# EAGLE board untitled (EAGLE 5.01)
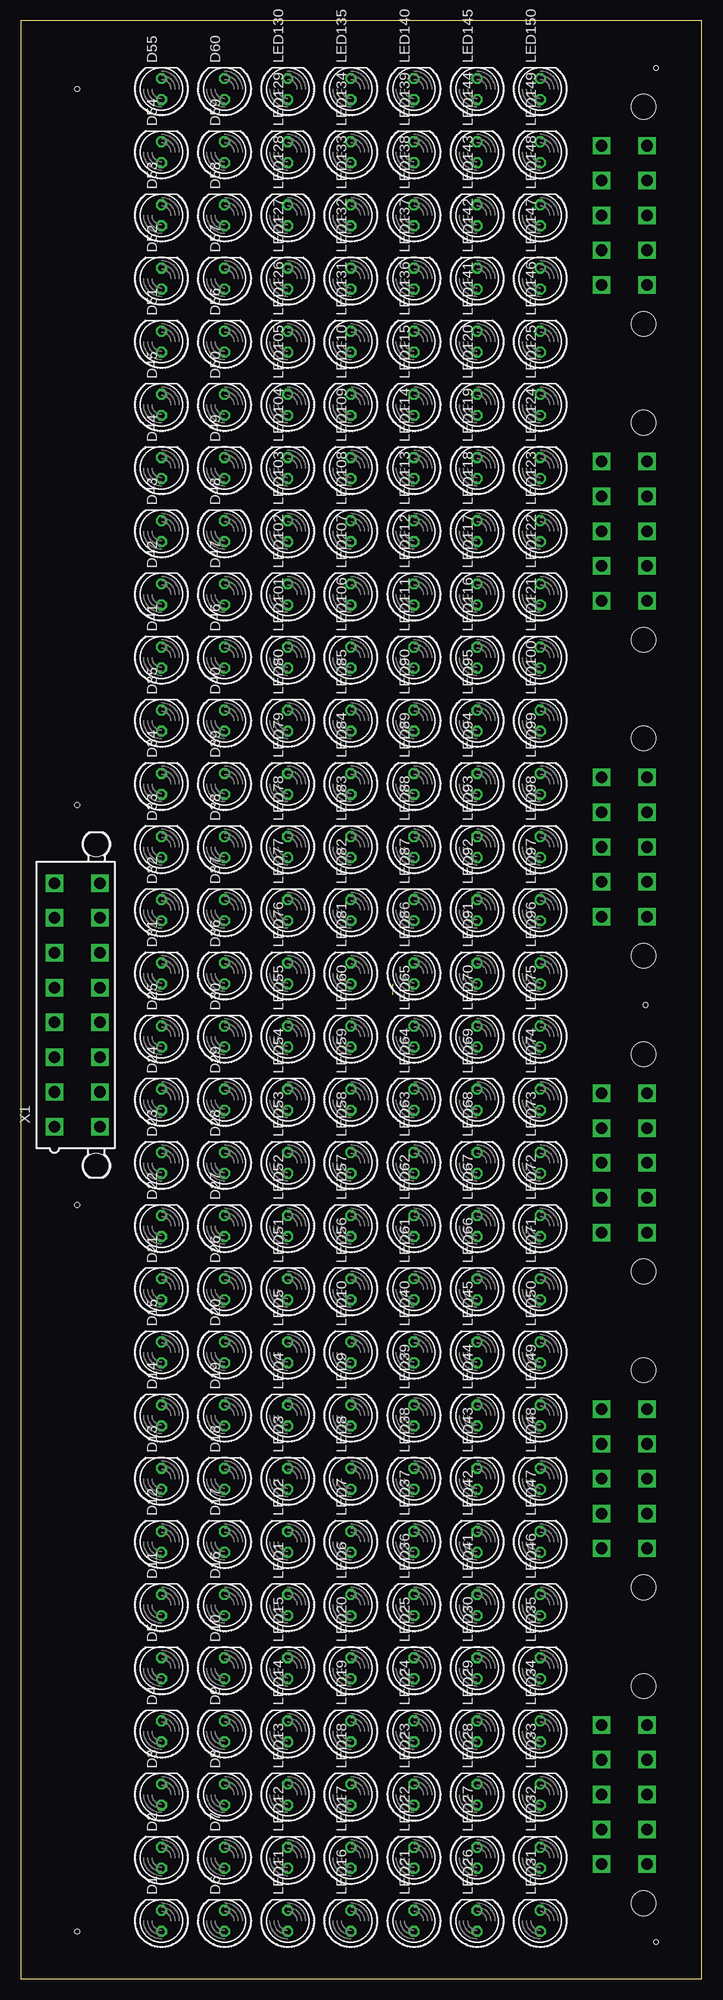
[diagram p0: board, top side]
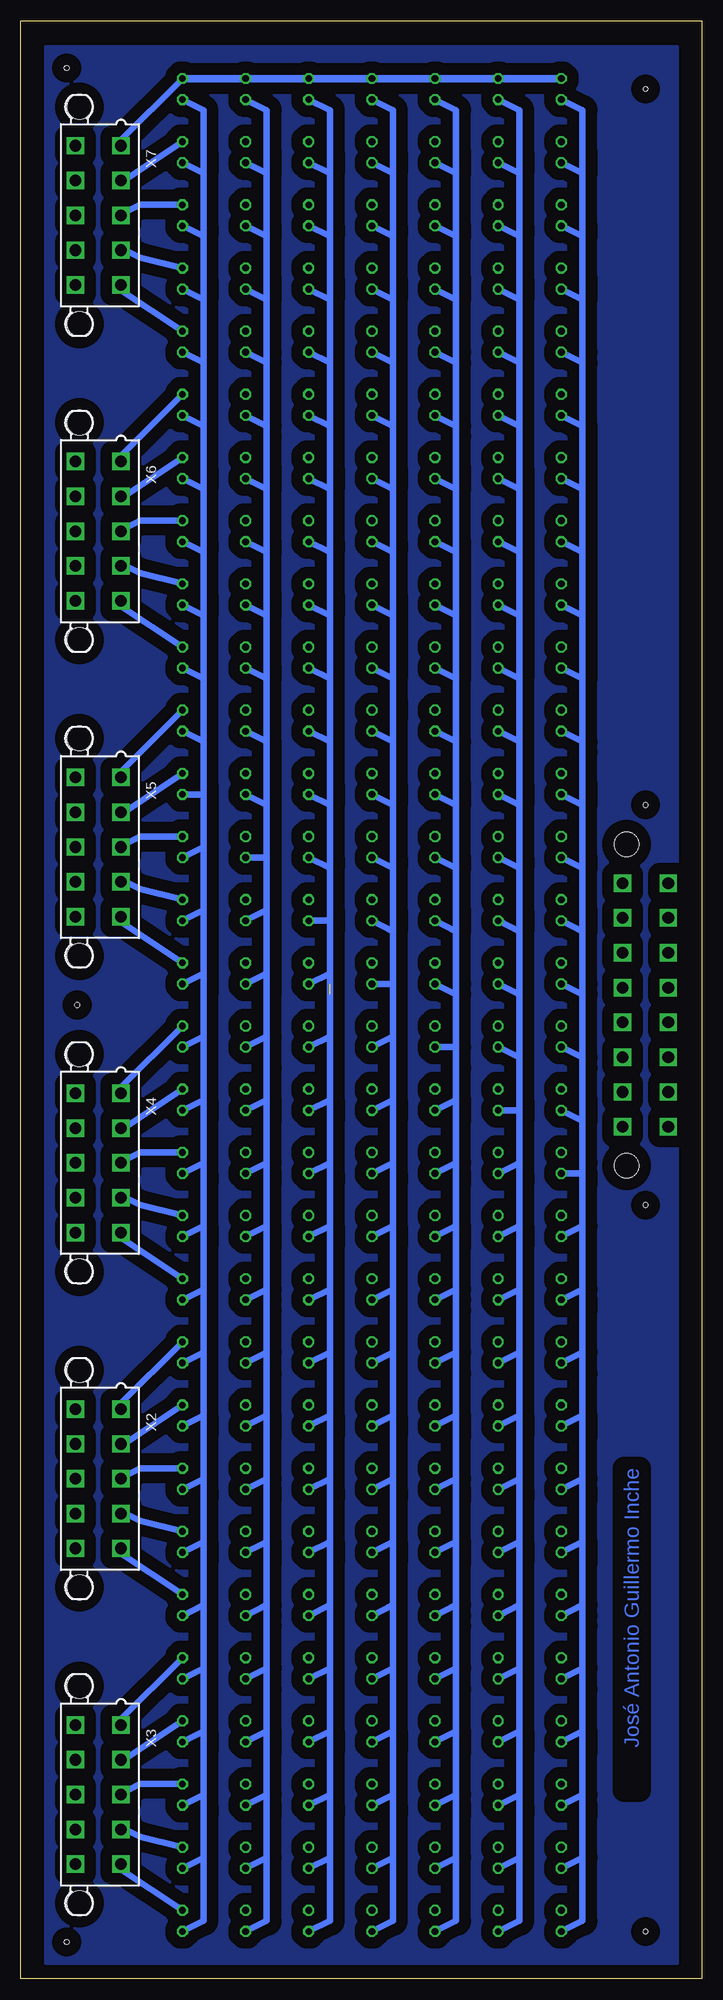
[diagram p1: board, bottom side, seen from below]

Size 82.22 x 236.2 mm. Coordinates in mm from the lower left corner, seen from the top.
Outline: 82.22,0 82.22,236.2 0,236.2 0,0 82.22,0
Copper layers (1*16): Top 0.035mm / dielectric 1.5mm / Bottom 0.035mm
Design rules "default *": minimum track width 30mil, minimum drill 24mil, track to track 8mil, track to pad 8mil, pad to pad 8mil, via to via 8mil, smd to smd 8mil, copper to edge 40mil, drill to drill 8mil, minimum pad ring 10mil, minimum via ring 8mil, stop-mask expansion 4mil, vias tented up to drill 0mil, thermal gap 10mil
Holes 0.6 mm at 6.82,5.71 6.82,227.96 76.67,230.5 76.67,4.44 6.82,93.34 6.82,141.6 75.4,117.47

## Footprints (pad centres in the part's own frame; a part is rotated, then mirrored left to right if it is on the bottom)
LED5MM = drill 0.813 octagon: A -1.27,0; K 1.27,0
5566-16 = drill 1.4 square: 1 14.7,-2.75; 2 10.5,-2.75; 3 6.3,-2.75; 4 2.1,-2.75; 5 -2.1,-2.75; 6 -6.3,-2.75; 7 -10.5,-2.75; 8 -14.7,-2.75; 9 14.7,2.75; 10 10.5,2.75; 11 6.3,2.75; 12 2.1,2.75; 13 -2.1,2.75; 14 -6.3,2.75; 15 -10.5,2.75; 16 -14.7,2.75 | hole 3: 19.4,2.29; -19.4,2.29
5566-10 = drill 1.4 square: 1 8.4,-2.75; 2 4.2,-2.75; 3 0,-2.75; 4 -4.2,-2.75; 5 -8.4,-2.75; 6 8.4,2.75; 7 4.2,2.75; 8 0,2.75; 9 -4.2,2.75; 10 -8.4,2.75 | hole 3: 13.1,2.29; -13.1,2.29

## Placement (x,y rotation side)
D1  [LED5MM]  16.98,6.98 90 top
D2  [LED5MM]  16.98,14.6 90 top
D3  [LED5MM]  16.98,22.22 90 top
D4  [LED5MM]  16.98,29.84 90 top
D5  [LED5MM]  16.98,37.46 90 top
D6  [LED5MM]  24.6,6.98 90 top
D7  [LED5MM]  24.6,14.6 90 top
D8  [LED5MM]  24.6,22.22 90 top
D9  [LED5MM]  24.6,29.84 90 top
D10  [LED5MM]  24.6,37.46 90 top
D11  [LED5MM]  16.98,45.08 90 top
D12  [LED5MM]  16.98,52.7 90 top
D13  [LED5MM]  16.98,60.32 90 top
D14  [LED5MM]  16.98,67.94 90 top
D15  [LED5MM]  16.98,75.56 90 top
D16  [LED5MM]  24.6,45.08 90 top
D17  [LED5MM]  24.6,52.7 90 top
D18  [LED5MM]  24.6,60.32 90 top
D19  [LED5MM]  24.6,67.94 90 top
D20  [LED5MM]  24.6,75.56 90 top
D21  [LED5MM]  16.98,83.18 90 top
D22  [LED5MM]  16.98,90.8 90 top
D23  [LED5MM]  16.98,98.42 90 top
D24  [LED5MM]  16.98,106.04 90 top
D25  [LED5MM]  16.98,113.66 90 top
D26  [LED5MM]  24.6,83.18 90 top
D27  [LED5MM]  24.6,90.8 90 top
D28  [LED5MM]  24.6,98.42 90 top
D29  [LED5MM]  24.6,106.04 90 top
D30  [LED5MM]  24.6,113.66 90 top
D31  [LED5MM]  16.98,121.28 90 top
D32  [LED5MM]  16.98,128.9 90 top
D33  [LED5MM]  16.98,136.52 90 top
D34  [LED5MM]  16.98,144.14 90 top
D35  [LED5MM]  16.98,151.76 90 top
D36  [LED5MM]  24.6,121.28 90 top
D37  [LED5MM]  24.6,128.9 90 top
D38  [LED5MM]  24.6,136.52 90 top
D39  [LED5MM]  24.6,144.14 90 top
D40  [LED5MM]  24.6,151.76 90 top
D41  [LED5MM]  16.98,159.38 90 top
D42  [LED5MM]  16.98,167 90 top
D43  [LED5MM]  16.98,174.62 90 top
D44  [LED5MM]  16.98,182.24 90 top
D45  [LED5MM]  16.98,189.86 90 top
D46  [LED5MM]  24.6,159.38 90 top
D47  [LED5MM]  24.6,167 90 top
D48  [LED5MM]  24.6,174.62 90 top
D49  [LED5MM]  24.6,182.24 90 top
D50  [LED5MM]  24.6,189.86 90 top
D51  [LED5MM]  16.98,197.48 90 top
D52  [LED5MM]  16.98,205.1 90 top
D53  [LED5MM]  16.98,212.72 90 top
D54  [LED5MM]  16.98,220.34 90 top
D55  [LED5MM]  16.98,227.96 90 top
D56  [LED5MM]  24.6,197.48 90 top
D57  [LED5MM]  24.6,205.1 90 top
D58  [LED5MM]  24.6,212.72 90 top
D59  [LED5MM]  24.6,220.34 90 top
D60  [LED5MM]  24.6,227.96 90 top
LED1  [LED5MM]  32.22,45.08 90 top
LED2  [LED5MM]  32.22,52.7 90 top
LED3  [LED5MM]  32.22,60.32 90 top
LED4  [LED5MM]  32.22,67.94 90 top
LED5  [LED5MM]  32.22,75.56 90 top
LED6  [LED5MM]  39.84,45.08 90 top
LED7  [LED5MM]  39.84,52.7 90 top
LED8  [LED5MM]  39.84,60.32 90 top
LED9  [LED5MM]  39.84,67.94 90 top
LED10  [LED5MM]  39.84,75.56 90 top
LED11  [LED5MM]  32.22,6.98 90 top
LED12  [LED5MM]  32.22,14.6 90 top
LED13  [LED5MM]  32.22,22.22 90 top
LED14  [LED5MM]  32.22,29.84 90 top
LED15  [LED5MM]  32.22,37.46 90 top
LED16  [LED5MM]  39.84,6.98 90 top
LED17  [LED5MM]  39.84,14.6 90 top
LED18  [LED5MM]  39.84,22.22 90 top
LED19  [LED5MM]  39.84,29.84 90 top
LED20  [LED5MM]  39.84,37.46 90 top
LED21  [LED5MM]  47.46,6.98 90 top
LED22  [LED5MM]  47.46,14.6 90 top
LED23  [LED5MM]  47.46,22.22 90 top
LED24  [LED5MM]  47.46,29.84 90 top
LED25  [LED5MM]  47.46,37.46 90 top
LED26  [LED5MM]  55.08,6.98 90 top
LED27  [LED5MM]  55.08,14.6 90 top
LED28  [LED5MM]  55.08,22.22 90 top
LED29  [LED5MM]  55.08,29.84 90 top
LED30  [LED5MM]  55.08,37.46 90 top
LED31  [LED5MM]  62.7,6.98 90 top
LED32  [LED5MM]  62.7,14.6 90 top
LED33  [LED5MM]  62.7,22.22 90 top
LED34  [LED5MM]  62.7,29.84 90 top
LED35  [LED5MM]  62.7,37.46 90 top
LED36  [LED5MM]  47.46,45.08 90 top
LED37  [LED5MM]  47.46,52.7 90 top
LED38  [LED5MM]  47.46,60.32 90 top
LED39  [LED5MM]  47.46,67.94 90 top
LED40  [LED5MM]  47.46,75.56 90 top
LED41  [LED5MM]  55.08,45.08 90 top
LED42  [LED5MM]  55.08,52.7 90 top
LED43  [LED5MM]  55.08,60.32 90 top
LED44  [LED5MM]  55.08,67.94 90 top
LED45  [LED5MM]  55.08,75.56 90 top
LED46  [LED5MM]  62.7,45.08 90 top
LED47  [LED5MM]  62.7,52.7 90 top
LED48  [LED5MM]  62.7,60.32 90 top
LED49  [LED5MM]  62.7,67.94 90 top
LED50  [LED5MM]  62.7,75.56 90 top
LED51  [LED5MM]  32.22,83.18 90 top
LED52  [LED5MM]  32.22,90.8 90 top
LED53  [LED5MM]  32.22,98.42 90 top
LED54  [LED5MM]  32.22,106.04 90 top
LED55  [LED5MM]  32.22,113.66 90 top
LED56  [LED5MM]  39.84,83.18 90 top
LED57  [LED5MM]  39.84,90.8 90 top
LED58  [LED5MM]  39.84,98.42 90 top
LED59  [LED5MM]  39.84,106.04 90 top
LED60  [LED5MM]  39.84,113.66 90 top
LED61  [LED5MM]  47.46,83.18 90 top
LED62  [LED5MM]  47.46,90.8 90 top
LED63  [LED5MM]  47.46,98.42 90 top
LED64  [LED5MM]  47.46,106.04 90 top
LED65  [LED5MM]  47.46,113.66 90 top
LED66  [LED5MM]  55.08,83.18 90 top
LED67  [LED5MM]  55.08,90.8 90 top
LED68  [LED5MM]  55.08,98.42 90 top
LED69  [LED5MM]  55.08,106.04 90 top
LED70  [LED5MM]  55.08,113.66 90 top
LED71  [LED5MM]  62.7,83.18 90 top
LED72  [LED5MM]  62.7,90.8 90 top
LED73  [LED5MM]  62.7,98.42 90 top
LED74  [LED5MM]  62.7,106.04 90 top
LED75  [LED5MM]  62.7,113.66 90 top
LED76  [LED5MM]  32.22,121.28 90 top
LED77  [LED5MM]  32.22,128.9 90 top
LED78  [LED5MM]  32.22,136.52 90 top
LED79  [LED5MM]  32.22,144.14 90 top
LED80  [LED5MM]  32.22,151.76 90 top
LED81  [LED5MM]  39.84,121.28 90 top
LED82  [LED5MM]  39.84,128.9 90 top
LED83  [LED5MM]  39.84,136.52 90 top
LED84  [LED5MM]  39.84,144.14 90 top
LED85  [LED5MM]  39.84,151.76 90 top
LED86  [LED5MM]  47.46,121.28 90 top
LED87  [LED5MM]  47.46,128.9 90 top
LED88  [LED5MM]  47.46,136.52 90 top
LED89  [LED5MM]  47.46,144.14 90 top
LED90  [LED5MM]  47.46,151.76 90 top
LED91  [LED5MM]  55.08,121.28 90 top
LED92  [LED5MM]  55.08,128.9 90 top
LED93  [LED5MM]  55.08,136.52 90 top
LED94  [LED5MM]  55.08,144.14 90 top
LED95  [LED5MM]  55.08,151.76 90 top
LED96  [LED5MM]  62.7,121.28 90 top
LED97  [LED5MM]  62.7,128.9 90 top
LED98  [LED5MM]  62.7,136.52 90 top
LED99  [LED5MM]  62.7,144.14 90 top
LED100  [LED5MM]  62.7,151.76 90 top
LED101  [LED5MM]  32.22,159.38 90 top
LED102  [LED5MM]  32.22,167 90 top
LED103  [LED5MM]  32.22,174.62 90 top
LED104  [LED5MM]  32.22,182.24 90 top
LED105  [LED5MM]  32.22,189.86 90 top
LED106  [LED5MM]  39.84,159.38 90 top
LED107  [LED5MM]  39.84,167 90 top
LED108  [LED5MM]  39.84,174.62 90 top
LED109  [LED5MM]  39.84,182.24 90 top
LED110  [LED5MM]  39.84,189.86 90 top
LED111  [LED5MM]  47.46,159.38 90 top
LED112  [LED5MM]  47.46,167 90 top
LED113  [LED5MM]  47.46,174.62 90 top
LED114  [LED5MM]  47.46,182.24 90 top
LED115  [LED5MM]  47.46,189.86 90 top
LED116  [LED5MM]  55.08,159.38 90 top
LED117  [LED5MM]  55.08,167 90 top
LED118  [LED5MM]  55.08,174.62 90 top
LED119  [LED5MM]  55.08,182.24 90 top
LED120  [LED5MM]  55.08,189.86 90 top
LED121  [LED5MM]  62.7,159.38 90 top
LED122  [LED5MM]  62.7,167 90 top
LED123  [LED5MM]  62.7,174.62 90 top
LED124  [LED5MM]  62.7,182.24 90 top
LED125  [LED5MM]  62.7,189.86 90 top
LED126  [LED5MM]  32.22,197.48 90 top
LED127  [LED5MM]  32.22,205.1 90 top
LED128  [LED5MM]  32.22,212.72 90 top
LED129  [LED5MM]  32.22,220.34 90 top
LED130  [LED5MM]  32.22,227.96 90 top
LED131  [LED5MM]  39.84,197.48 90 top
LED132  [LED5MM]  39.84,205.1 90 top
LED133  [LED5MM]  39.84,212.72 90 top
LED134  [LED5MM]  39.84,220.34 90 top
LED135  [LED5MM]  39.84,227.96 90 top
LED136  [LED5MM]  47.46,197.48 90 top
LED137  [LED5MM]  47.46,205.1 90 top
LED138  [LED5MM]  47.46,212.72 90 top
LED139  [LED5MM]  47.46,220.34 90 top
LED140  [LED5MM]  47.46,227.96 90 top
LED141  [LED5MM]  55.08,197.48 90 top
LED142  [LED5MM]  55.08,205.1 90 top
LED143  [LED5MM]  55.08,212.72 90 top
LED144  [LED5MM]  55.08,220.34 90 top
LED145  [LED5MM]  55.08,227.96 90 top
LED146  [LED5MM]  62.7,197.48 90 top
LED147  [LED5MM]  62.7,205.1 90 top
LED148  [LED5MM]  62.7,212.72 90 top
LED149  [LED5MM]  62.7,220.34 90 top
LED150  [LED5MM]  62.7,227.96 90 top
X1  5566-16  [5566-16]  6.82,117.47 270 top
X2  5566-10  [5566-10]  72.86,60.32 90 bottom
X3  5566-10  [5566-10]  72.86,22.22 90 bottom
X4  5566-10  [5566-10]  72.86,98.42 90 bottom
X5  5566-10  [5566-10]  72.86,136.52 90 bottom
X6  5566-10  [5566-10]  72.86,174.62 90 bottom
X7  5566-10  [5566-10]  72.86,212.72 90 bottom

## Library data of the parts
D1-D60 LED1-LED150 = led
X1-X7 = con-molex

## Nets
N$22: D36.A D37.A D38.A D39.A D40.A
N$29: D46.A D47.A D48.A D49.A D50.A
N$36: D56.A D57.A D58.A D59.A D60.A
S$1: LED31.K
S$4: LED32.K
S$5: LED33.K
S$6: LED34.K
S$7: LED35.K
S$31: D55.K

## Tracks (layer width: path | path; a pad name or v marks a point on that pad's centre or on a via)
N$1
  Bottom 0.762: 22.06,106.04 22.06,104.77 | 22.06,104.77 22.06,103.5 | 22.06,104.77 24.6,104.77 | 22.06,106.04 22.06,109.85 | 22.06,109.85 22.06,111.12 24.6,112.39 | 22.06,97.15 22.06,95.88 | 22.06,97.15 22.06,98.42 24.6,97.15 | 22.06,97.15 22.06,106.04 | 22.06,90.8 22.06,88.26 | 22.06,90.8 22.06,89.53 | 22.06,90.8 24.6,89.53 | 22.06,90.8 22.06,97.15 | 22.06,80.64 22.06,90.8 | 24.6,81.91 22.06,83.18 22.06,80.64 | 22.06,80.64 22.06,81.91 | 22.06,109.85 22.06,118.74
N$2
  Bottom 0.762: 14.44,73.02 14.44,75.56 16.98,74.29 | 14.44,73.02 14.44,81.91 | 14.44,67.94 16.98,66.67 | 14.44,67.94 14.44,65.4 | 14.44,67.94 14.44,73.02 | 14.44,59.05 14.44,60.32 16.98,59.05 | 14.44,59.05 14.44,57.78 | 14.44,59.05 14.44,67.94 | 14.44,52.7 16.98,51.43 | 14.44,52.7 14.44,50.16 | 14.44,52.7 14.44,59.05 | 14.44,42.54 14.44,52.7 | 14.44,42.54 14.44,45.08 16.98,43.81 | 14.44,42.54 14.44,43.81 | 14.44,34.92 14.44,37.46 16.98,36.19 | 14.44,34.92 14.44,42.54 | 14.44,29.84 16.98,28.57 | 14.44,29.84 14.44,27.3 | 14.44,29.84 14.44,34.92 | 14.44,20.95 14.44,22.22 16.98,20.95 | 14.44,20.95 14.44,19.68 | 14.44,20.95 14.44,29.84 | 14.44,14.6 16.98,13.33 | 14.44,14.6 14.44,20.95 | 14.44,14.6 14.44,6.98 16.98,5.71
N$3
  Bottom 0.762: 22.06,73.02 22.06,75.56 24.6,74.29 | 22.06,73.02 22.06,81.91 | 22.06,67.94 24.6,66.67 | 22.06,67.94 22.06,65.4 | 22.06,67.94 22.06,73.02 | 22.06,59.05 22.06,60.32 24.6,59.05 | 22.06,59.05 22.06,57.78 | 22.06,59.05 22.06,67.94 | 22.06,52.7 24.6,51.43 | 22.06,52.7 22.06,50.16 | 22.06,52.7 22.06,59.05 | 22.06,42.54 22.06,52.7 | 22.06,42.54 22.06,45.08 24.6,43.81 | 22.06,42.54 22.06,43.81 | 22.06,34.92 22.06,37.46 24.6,36.19 | 22.06,34.92 22.06,42.54 | 22.06,29.84 24.6,28.57 | 22.06,29.84 22.06,27.3 | 22.06,29.84 22.06,34.92 | 22.06,20.95 22.06,22.22 24.6,20.95 | 22.06,20.95 22.06,19.68 | 22.06,20.95 22.06,29.84 | 22.06,14.6 24.6,13.33 | 22.06,14.6 22.06,20.95 | 22.06,14.6 22.06,6.98 24.6,5.71
N$4
  Bottom 0.762: 29.68,106.04 29.68,103.5 | 29.68,106.04 32.22,104.77 | 29.68,106.04 29.68,109.85 | 29.68,97.15 29.68,95.88 | 29.68,97.15 29.68,98.42 32.22,97.15 | 29.68,97.15 29.68,106.04 | 29.68,90.8 29.68,88.26 | 29.68,90.8 32.22,89.53 | 29.68,90.8 29.68,97.15 | 29.68,80.64 29.68,90.8 | 32.22,81.91 29.68,83.18 29.68,80.64 | 29.68,80.64 29.68,81.91 | 29.68,109.85 29.68,112.39 32.22,112.39 | 29.68,109.85 29.68,118.74
N$5
  Bottom 0.762: 29.68,73.02 29.68,75.56 32.22,74.29 | 29.68,73.02 29.68,81.91 | 29.68,67.94 32.22,66.67 | 29.68,67.94 29.68,65.4 | 29.68,67.94 29.68,73.02 | 29.68,59.05 29.68,60.32 32.22,59.05 | 29.68,59.05 29.68,57.78 | 29.68,59.05 29.68,67.94 | 29.68,52.7 32.22,51.43 | 29.68,52.7 29.68,50.16 | 29.68,52.7 29.68,59.05 | 29.68,42.54 29.68,52.7 | 29.68,42.54 29.68,45.08 32.22,43.81 | 29.68,42.54 29.68,43.81 | 29.68,34.92 29.68,37.46 32.22,36.19 | 29.68,34.92 29.68,42.54 | 29.68,29.84 32.22,28.57 | 29.68,29.84 29.68,27.3 | 29.68,29.84 29.68,34.92 | 29.68,20.95 29.68,22.22 32.22,20.95 | 29.68,20.95 29.68,19.68 | 29.68,20.95 29.68,29.84 | 29.68,14.6 32.22,13.33 | 29.68,14.6 29.68,20.95 | 29.68,14.6 29.68,6.98 32.22,5.71
N$6
  Bottom 0.762: 37.3,106.04 37.3,103.5 | 37.3,106.04 39.84,104.77 | 37.3,106.04 37.3,109.85 | 37.3,97.15 37.3,95.88 | 37.3,97.15 37.3,98.42 39.84,97.15 | 37.3,97.15 37.3,106.04 | 37.3,90.8 37.3,88.26 | 37.3,90.8 39.84,89.53 | 37.3,90.8 37.3,97.15 | 37.3,80.64 37.3,90.8 | 39.84,81.91 37.3,83.18 37.3,80.64 | 37.3,80.64 37.3,81.91 | 37.3,109.85 37.3,113.66 39.84,112.39 | 37.3,109.85 37.3,118.74
N$7
  Bottom 0.762: 37.3,73.02 37.3,75.56 39.84,74.29 | 37.3,73.02 37.3,81.91 | 37.3,67.94 39.84,66.67 | 37.3,67.94 37.3,65.4 | 37.3,67.94 37.3,73.02 | 37.3,59.05 37.3,60.32 39.84,59.05 | 37.3,59.05 37.3,57.78 | 37.3,59.05 37.3,67.94 | 37.3,52.7 39.84,51.43 | 37.3,52.7 37.3,50.16 | 37.3,52.7 37.3,59.05 | 37.3,42.54 37.3,52.7 | 37.3,42.54 37.3,45.08 39.84,43.81 | 37.3,42.54 37.3,43.81 | 37.3,34.92 37.3,37.46 39.84,36.19 | 37.3,34.92 37.3,42.54 | 37.3,29.84 39.84,28.57 | 37.3,29.84 37.3,27.3 | 37.3,29.84 37.3,34.92 | 37.3,20.95 37.3,22.22 39.84,20.95 | 37.3,20.95 37.3,19.68 | 37.3,20.95 37.3,29.84 | 37.3,14.6 39.84,13.33 | 37.3,14.6 37.3,20.95 | 37.3,14.6 37.3,6.98 39.84,5.71
N$8
  Bottom 0.762: 44.92,106.04 44.92,103.5 | 44.92,106.04 47.46,104.77 | 44.92,106.04 44.92,109.85 | 44.92,97.15 44.92,95.88 | 44.92,97.15 44.92,98.42 47.46,97.15 | 44.92,97.15 44.92,106.04 | 44.92,90.8 44.92,88.26 | 44.92,90.8 47.46,89.53 | 44.92,90.8 44.92,97.15 | 44.92,80.64 44.92,90.8 | 47.46,81.91 44.92,83.18 44.92,80.64 | 44.92,80.64 44.92,81.91 | 44.92,109.85 44.92,113.66 47.46,112.39 | 44.92,109.85 44.92,118.74
N$9
  Bottom 0.762: 44.92,73.02 44.92,75.56 47.46,74.29 | 44.92,73.02 44.92,81.91 | 44.92,67.94 47.46,66.67 | 44.92,67.94 44.92,65.4 | 44.92,67.94 44.92,73.02 | 44.92,59.05 44.92,60.32 47.46,59.05 | 44.92,59.05 44.92,57.78 | 44.92,59.05 44.92,67.94 | 44.92,52.7 47.46,51.43 | 44.92,52.7 44.92,50.16 | 44.92,52.7 44.92,59.05 | 44.92,42.54 44.92,52.7 | 44.92,42.54 44.92,45.08 47.46,43.81 | 44.92,42.54 44.92,43.81 | 44.92,34.92 44.92,37.46 47.46,36.19 | 44.92,34.92 44.92,42.54 | 44.92,29.84 47.46,28.57 | 44.92,29.84 44.92,27.3 | 44.92,29.84 44.92,34.92 | 44.92,20.95 44.92,22.22 47.46,20.95 | 44.92,20.95 44.92,19.68 | 44.92,20.95 44.92,29.84 | 44.92,14.6 47.46,13.33 | 44.92,14.6 44.92,20.95 | 44.92,14.6 44.92,6.98 47.46,5.71
N$10
  Bottom 0.762: 52.54,106.04 52.54,103.5 | 52.54,106.04 55.08,104.77 | 52.54,106.04 52.54,109.85 | 52.54,97.15 52.54,95.88 | 52.54,97.15 52.54,98.42 55.08,97.15 | 52.54,97.15 52.54,106.04 | 52.54,90.8 52.54,88.26 | 52.54,90.8 55.08,89.53 | 52.54,90.8 52.54,97.15 | 52.54,80.64 52.54,90.8 | 55.08,81.91 52.54,83.18 52.54,80.64 | 52.54,80.64 52.54,81.91 | 52.54,109.85 52.54,113.66 55.08,112.39 | 52.54,109.85 52.54,118.74
N$11
  Bottom 0.762: 52.54,73.02 52.54,75.56 55.08,74.29 | 52.54,73.02 52.54,81.91 | 52.54,67.94 55.08,66.67 | 52.54,67.94 52.54,65.4 | 52.54,67.94 52.54,73.02 | 52.54,59.05 52.54,60.32 55.08,59.05 | 52.54,59.05 52.54,57.78 | 52.54,59.05 52.54,67.94 | 52.54,52.7 55.08,51.43 | 52.54,52.7 52.54,50.16 | 52.54,52.7 52.54,59.05 | 52.54,42.54 52.54,52.7 | 52.54,42.54 52.54,45.08 55.08,43.81 | 52.54,42.54 52.54,43.81 | 52.54,34.92 52.54,37.46 55.08,36.19 | 52.54,34.92 52.54,42.54 | 52.54,29.84 55.08,28.57 | 52.54,29.84 52.54,27.3 | 52.54,29.84 52.54,34.92 | 52.54,20.95 52.54,22.22 55.08,20.95 | 52.54,20.95 52.54,19.68 | 52.54,20.95 52.54,29.84 | 52.54,14.6 55.08,13.33 | 52.54,14.6 52.54,20.95 | 52.54,14.6 52.54,6.98 55.08,5.71
N$12
  Bottom 0.762: 60.16,106.04 60.16,103.5 | 60.16,106.04 62.7,104.77 | 60.16,106.04 60.16,109.85 | 60.16,97.15 60.16,95.88 | 60.16,97.15 60.16,98.42 62.7,97.15 | 60.16,97.15 60.16,106.04 | 60.16,90.8 60.16,88.26 | 60.16,90.8 62.7,89.53 | 60.16,90.8 60.16,97.15 | 60.16,80.64 60.16,90.8 | 62.7,81.91 60.16,83.18 60.16,80.64 | 60.16,80.64 60.16,81.91 | 60.16,109.85 60.16,113.66 62.7,112.39 | 60.16,109.85 60.16,118.74
N$13
  Bottom 0.762: 60.16,73.02 60.16,75.56 62.7,74.29 | 60.16,73.02 60.16,81.91 | 60.16,67.94 62.7,66.67 | 60.16,67.94 60.16,65.4 | 60.16,67.94 60.16,73.02 | 60.16,59.05 60.16,60.32 62.7,59.05 | 60.16,59.05 60.16,57.78 | 60.16,59.05 60.16,67.94 | 60.16,52.7 62.7,51.43 | 60.16,52.7 60.16,50.16 | 60.16,52.7 60.16,59.05 | 60.16,42.54 60.16,52.7 | 60.16,42.54 60.16,45.08 62.7,43.81 | 60.16,42.54 60.16,43.81 | 60.16,34.92 60.16,37.46 62.7,36.19 | 60.16,34.92 60.16,42.54 | 60.16,29.84 62.7,28.57 | 60.16,29.84 60.16,27.3 | 60.16,29.84 60.16,34.92 | 60.16,20.95 60.16,22.22 62.7,20.95 | 60.16,20.95 60.16,19.68 | 60.16,20.95 60.16,29.84 | 60.16,14.6 62.7,13.33 | 60.16,14.6 60.16,20.95 | 60.16,14.6 60.16,6.98 62.7,5.71
N$17
  Bottom 0.762: 14.44,106.04 14.44,103.5 16.98,104.77 | 14.44,106.04 14.44,109.85 | 14.44,109.85 14.44,111.12 16.98,112.39 | 14.44,97.15 14.44,98.42 | 14.44,97.15 14.44,95.88 | 14.44,97.15 16.98,97.15 | 14.44,97.15 14.44,106.04 | 14.44,90.8 16.98,89.53 | 14.44,90.8 14.44,97.15 | 14.44,81.91 14.44,90.8 | 16.98,81.91 14.44,83.18 14.44,81.91 | 14.44,81.91 14.44,80.64 | 14.44,109.85 14.44,118.74
N$22
  Bottom 0.762: 22.06,149.22 D40.A | 22.06,144.14 22.06,141.6 D39.A | 22.06,144.14 22.06,149.22 | 22.06,135.25 22.06,133.98 D38.A | 22.06,135.25 22.06,144.14 | 22.06,128.9 22.06,126.36 D37.A | 22.06,128.9 22.06,135.25 | 22.06,118.74 22.06,128.9 | 22.06,118.74 D36.A | 22.06,118.74 22.06,120.01 | 22.06,149.22 22.06,158.11
N$23
  Bottom 0.762: 29.68,149.22 32.22,150.49 | 29.68,144.14 29.68,141.6 32.22,142.87 | 29.68,144.14 29.68,149.22 | 29.68,135.25 29.68,133.98 32.22,135.25 | 29.68,135.25 29.68,144.14 | 29.68,128.9 29.68,126.36 32.22,127.63 | 29.68,128.9 29.68,135.25 | 29.68,118.74 29.68,128.9 | 29.68,118.74 32.22,120.01 | 29.68,118.74 29.68,120.01 | 29.68,149.22 29.68,158.11
N$24
  Bottom 0.762: 14.44,144.14 14.44,141.6 16.98,142.87 | 14.44,144.14 14.44,147.95 | 14.44,147.95 14.44,149.22 16.98,150.49 | 14.44,135.25 14.44,133.98 16.98,135.25 | 14.44,135.25 14.44,144.14 | 14.44,128.9 14.44,126.36 16.98,127.63 | 14.44,128.9 14.44,135.25 | 14.44,118.74 14.44,128.9 | 14.44,118.74 16.98,120.01 | 14.44,118.74 14.44,120.01 | 14.44,147.95 14.44,156.84
N$25
  Bottom 0.762: 37.3,149.22 39.84,150.49 | 37.3,144.14 37.3,141.6 39.84,142.87 | 37.3,144.14 37.3,149.22 | 37.3,135.25 37.3,133.98 39.84,135.25 | 37.3,135.25 37.3,144.14 | 37.3,128.9 37.3,126.36 39.84,127.63 | 37.3,128.9 37.3,135.25 | 37.3,120.01 37.3,128.9 | 37.3,120.01 39.84,120.01 | 37.3,118.74 37.3,120.01 | 37.3,154.3 37.3,151.76 | 37.3,154.3 37.3,156.84 | 37.3,149.22 37.3,154.3
N$26  (1 unrouted)
  Bottom 0.762: 47.46,150.49 44.92,149.22 44.92,147.95 | 44.92,144.14 44.92,141.6 47.46,142.87 | 44.92,144.14 44.92,147.95 | 44.92,135.25 44.92,133.98 47.46,135.25 | 44.92,135.25 44.92,144.14 | 44.92,128.9 44.92,127.63 | 44.92,127.63 44.92,126.36 | 44.92,127.63 47.46,127.63 | 44.92,128.9 44.92,135.25 | 44.92,120.01 44.92,121.28 47.46,120.01 | 44.92,118.74 44.92,128.9 | 44.92,147.95 44.92,156.84
N$27
  Bottom 0.762: 55.08,150.49 52.54,149.22 | 52.54,144.14 52.54,141.6 55.08,142.87 | 52.54,149.22 52.54,144.14 | 52.54,135.25 52.54,133.98 | 52.54,135.25 55.08,135.25 | 52.54,144.14 52.54,135.25 | 52.54,128.9 52.54,126.36 | 52.54,128.9 55.08,127.63 | 52.54,135.25 52.54,128.9 | 52.54,128.9 52.54,120.01 | 55.08,120.01 52.54,121.28 52.54,120.01 | 52.54,120.01 52.54,118.74 | 52.54,149.22 52.54,158.11
N$28
  Bottom 0.762: 62.7,150.49 60.16,149.22 60.16,147.95 | 60.16,144.14 60.16,142.87 | 60.16,142.87 60.16,141.6 | 60.16,142.87 62.7,142.87 | 60.16,144.14 60.16,147.95 | 60.16,135.25 60.16,133.98 | 60.16,135.25 60.16,136.52 62.7,135.25 | 60.16,144.14 60.16,135.25 | 60.16,128.9 60.16,126.36 | 60.16,128.9 62.7,127.63 | 60.16,135.25 60.16,128.9 | 60.16,121.28 62.7,120.01 | 60.16,121.28 60.16,118.74 | 60.16,128.9 60.16,121.28 | 60.16,147.95 60.16,156.84
N$29
  Bottom 0.762: 22.06,187.32 D50.A | 22.06,182.24 22.06,179.7 D49.A | 22.06,182.24 22.06,187.32 | 22.06,173.35 22.06,172.08 D48.A | 22.06,182.24 22.06,173.35 | 22.06,167 22.06,164.46 D47.A | 22.06,173.35 22.06,167 | 22.06,167 22.06,156.84 | 22.06,156.84 D46.A | 22.06,156.84 22.06,158.11 | 22.06,187.32 22.06,196.21
N$30
  Bottom 0.762: 32.22,188.59 29.68,187.32 29.68,186.05 | 29.68,182.24 29.68,179.7 32.22,180.97 | 29.68,182.24 29.68,186.05 | 29.68,173.35 29.68,172.08 32.22,173.35 | 29.68,173.35 29.68,182.24 | 29.68,167 29.68,164.46 32.22,165.73 | 29.68,173.35 29.68,167 | 29.68,167 29.68,158.11 29.68,156.84 32.22,158.11 | 29.68,186.05 29.68,194.94
N$31
  Bottom 0.762: 14.44,182.24 14.44,179.7 16.98,180.97 | 14.44,186.05 14.44,182.24 | 14.44,186.05 14.44,187.32 16.98,188.59 | 14.44,173.35 14.44,172.08 16.98,173.35 | 14.44,182.24 14.44,173.35 | 14.44,167 14.44,164.46 16.98,165.73 | 14.44,173.35 14.44,167 | 14.44,167 14.44,156.84 | 14.44,156.84 16.98,158.11 | 14.44,156.84 14.44,158.11 | 14.44,186.05 14.44,194.94
N$32
  Bottom 0.762: 37.3,187.32 39.84,188.59 | 37.3,182.24 37.3,179.7 39.84,180.97 | 37.3,182.24 37.3,187.32 | 37.3,173.35 37.3,172.08 39.84,173.35 | 37.3,173.35 37.3,182.24 | 37.3,167 37.3,164.46 39.84,165.73 | 37.3,167 37.3,173.35 | 37.3,167 37.3,156.84 | 37.3,156.84 39.84,158.11 | 37.3,156.84 37.3,158.11 | 37.3,187.32 37.3,196.21
N$33
  Bottom 0.762: 47.46,188.59 44.92,187.32 44.92,186.05 | 44.92,182.24 44.92,179.7 47.46,180.97 | 44.92,182.24 44.92,186.05 | 44.92,173.35 44.92,172.08 47.46,173.35 | 44.92,173.35 44.92,182.24 | 44.92,167 44.92,164.46 47.46,165.73 | 44.92,167 44.92,173.35 | 44.92,167 44.92,158.11 44.92,156.84 47.46,158.11 | 44.92,186.05 44.92,194.94
N$34
  Bottom 0.762: 55.08,188.59 52.54,187.32 52.54,186.05 | 52.54,182.24 52.54,179.7 55.08,180.97 | 52.54,182.24 52.54,186.05 | 52.54,173.35 52.54,172.08 55.08,173.35 | 52.54,173.35 52.54,182.24 | 52.54,167 52.54,164.46 55.08,165.73 | 52.54,167 52.54,173.35 | 52.54,167 52.54,158.11 52.54,156.84 55.08,158.11 | 52.54,186.05 52.54,194.94
N$35
  Bottom 0.762: 60.16,187.32 62.7,188.59 | 60.16,182.24 60.16,179.7 62.7,180.97 | 60.16,182.24 60.16,187.32 | 60.16,173.35 60.16,172.08 62.7,173.35 | 60.16,173.35 60.16,182.24 | 60.16,167 60.16,164.46 62.7,165.73 | 60.16,167 60.16,173.35 | 60.16,156.84 60.16,167 | 60.16,156.84 62.7,158.11 | 60.16,156.84 60.16,158.11 | 60.16,187.32 60.16,196.21
N$36
  Bottom 0.762: D60.A 22.06,225.42 22.06,220.34 | 22.06,220.34 22.06,217.8 D59.A | 22.06,211.45 22.06,210.18 D58.A | 22.06,211.45 22.06,220.34 | 22.06,205.1 22.06,202.56 D57.A | 22.06,205.1 22.06,211.45 | 22.06,194.94 22.06,205.1 | 22.06,194.94 D56.A | 22.06,194.94 22.06,196.21
N$37
  Bottom 0.762: 32.22,226.69 29.68,225.42 29.68,220.34 | 29.68,220.34 29.68,217.8 32.22,219.07 | 29.68,211.45 29.68,210.18 32.22,211.45 | 29.68,211.45 29.68,220.34 | 29.68,205.1 29.68,202.56 32.22,203.83 | 29.68,205.1 29.68,211.45 | 29.68,194.94 29.68,205.1 | 29.68,194.94 32.22,196.21 | 29.68,194.94 29.68,196.21
N$38
  Bottom 0.762: 14.44,220.34 14.44,217.8 16.98,219.07 | 14.44,220.34 14.44,225.42 16.98,226.69 | 14.44,211.45 14.44,210.18 16.98,211.45 | 14.44,211.45 14.44,220.34 | 14.44,205.1 14.44,202.56 16.98,203.83 | 14.44,205.1 14.44,211.45 | 14.44,194.94 14.44,205.1 | 14.44,194.94 16.98,196.21 | 14.44,194.94 14.44,196.21
N$39
  Bottom 0.762: 39.84,226.69 37.3,225.42 37.3,220.34 | 37.3,220.34 37.3,217.8 39.84,219.07 | 37.3,211.45 37.3,210.18 39.84,211.45 | 37.3,211.45 37.3,220.34 | 37.3,205.1 37.3,202.56 39.84,203.83 | 37.3,205.1 37.3,211.45 | 37.3,194.94 37.3,205.1 | 37.3,194.94 39.84,196.21 | 37.3,194.94 37.3,196.21
N$40
  Bottom 0.762: 47.46,226.69 44.92,225.42 44.92,220.34 | 44.92,220.34 44.92,217.8 47.46,219.07 | 44.92,211.45 44.92,210.18 47.46,211.45 | 44.92,211.45 44.92,220.34 | 44.92,205.1 44.92,202.56 47.46,203.83 | 44.92,205.1 44.92,211.45 | 44.92,194.94 44.92,205.1 | 44.92,194.94 47.46,196.21 | 44.92,194.94 44.92,196.21
N$41
  Bottom 0.762: 55.08,226.69 52.54,225.42 52.54,220.34 | 52.54,220.34 52.54,217.8 55.08,219.07 | 52.54,211.45 52.54,210.18 55.08,211.45 | 52.54,211.45 52.54,220.34 | 52.54,205.1 52.54,202.56 55.08,203.83 | 52.54,205.1 52.54,211.45 | 52.54,194.94 52.54,205.1 | 52.54,194.94 55.08,196.21 | 52.54,194.94 52.54,196.21
N$42
  Bottom 0.762: 62.7,226.69 60.16,225.42 60.16,220.34 | 60.16,220.34 60.16,217.8 62.7,219.07 | 60.16,211.45 60.16,210.18 62.7,211.45 | 60.16,211.45 60.16,220.34 | 60.16,205.1 60.16,202.56 62.7,203.83 | 60.16,205.1 60.16,211.45 | 60.16,194.94 60.16,205.1 | 60.16,194.94 62.7,196.21 | 60.16,194.94 60.16,196.21
S$1
  Bottom 0.762: LED31.K 70.32,13.33
S$4
  Bottom 0.762: 70.32,18.41 67.78,17.14 LED32.K
S$5
  Bottom 0.762: 70.32,22.22 67.78,23.49 LED33.K
S$6
  Bottom 0.762: LED34.K 70.32,26.03
S$7
  Bottom 0.762: LED35.K 70.32,31.11
S$8
  Bottom 0.762: 62.7,46.35 70.32,51.43
S$9
  Bottom 0.762: 70.32,56.51 67.78,55.24 62.7,53.97
S$10
  Bottom 0.762: 70.32,60.32 67.78,61.59 62.7,61.59
S$11
  Bottom 0.762: 70.32,69.21 62.7,76.83
S$12
  Bottom 0.762: 62.7,69.21 70.32,64.13
S$13
  Bottom 0.762: 62.7,84.45 70.32,89.53
S$14
  Bottom 0.762: 70.32,94.61 67.78,93.34 62.7,92.07
S$15
  Bottom 0.762: 70.32,98.42 67.78,99.69 62.7,99.69
S$16
  Bottom 0.762: 70.32,107.31 62.7,114.93
S$17
  Bottom 0.762: 62.7,107.31 70.32,102.23
S$18
  Bottom 0.762: 62.7,122.55 70.32,127.63
S$19
  Bottom 0.762: 70.32,132.71 67.78,131.44 62.7,130.17
S$20
  Bottom 0.762: 70.32,136.52 67.78,137.79 62.7,137.79
S$21
  Bottom 0.762: 70.32,145.41 62.7,153.03
S$22
  Bottom 0.762: 62.7,145.41 70.32,140.33
S$23
  Bottom 0.762: 62.7,160.65 70.32,165.73
S$24
  Bottom 0.762: 70.32,170.81 67.78,169.54 62.7,168.27
S$25
  Bottom 0.762: 70.32,174.62 67.78,175.89 62.7,175.89
S$26
  Bottom 0.762: 70.32,183.51 62.7,191.13
S$27
  Bottom 0.762: 62.7,183.51 70.32,178.43
S$28
  Bottom 0.762: 62.7,198.75 70.32,203.83
S$29
  Bottom 0.762: 70.32,208.91 67.78,207.64 62.7,206.37
S$30
  Bottom 0.762: 70.32,212.72 67.78,213.99 62.7,213.99
S$31
  Bottom 0.762: 62.7,229.23 70.32,221.61
  Bottom 0.914: D55.K 62.7,229.23
S$32
  Bottom 0.762: 62.7,221.61 70.32,216.53
S$33
  pour Bottom (isolate 1.422): 79.21,1.9 79.21,233.04 3.01,233.04 3.01,1.9

## Text on the board
Bottom: José Antonio Guillermo Inche